# EAGLE board Aegis PCB 3D - 2 v66 (EAGLE 9.7.0)
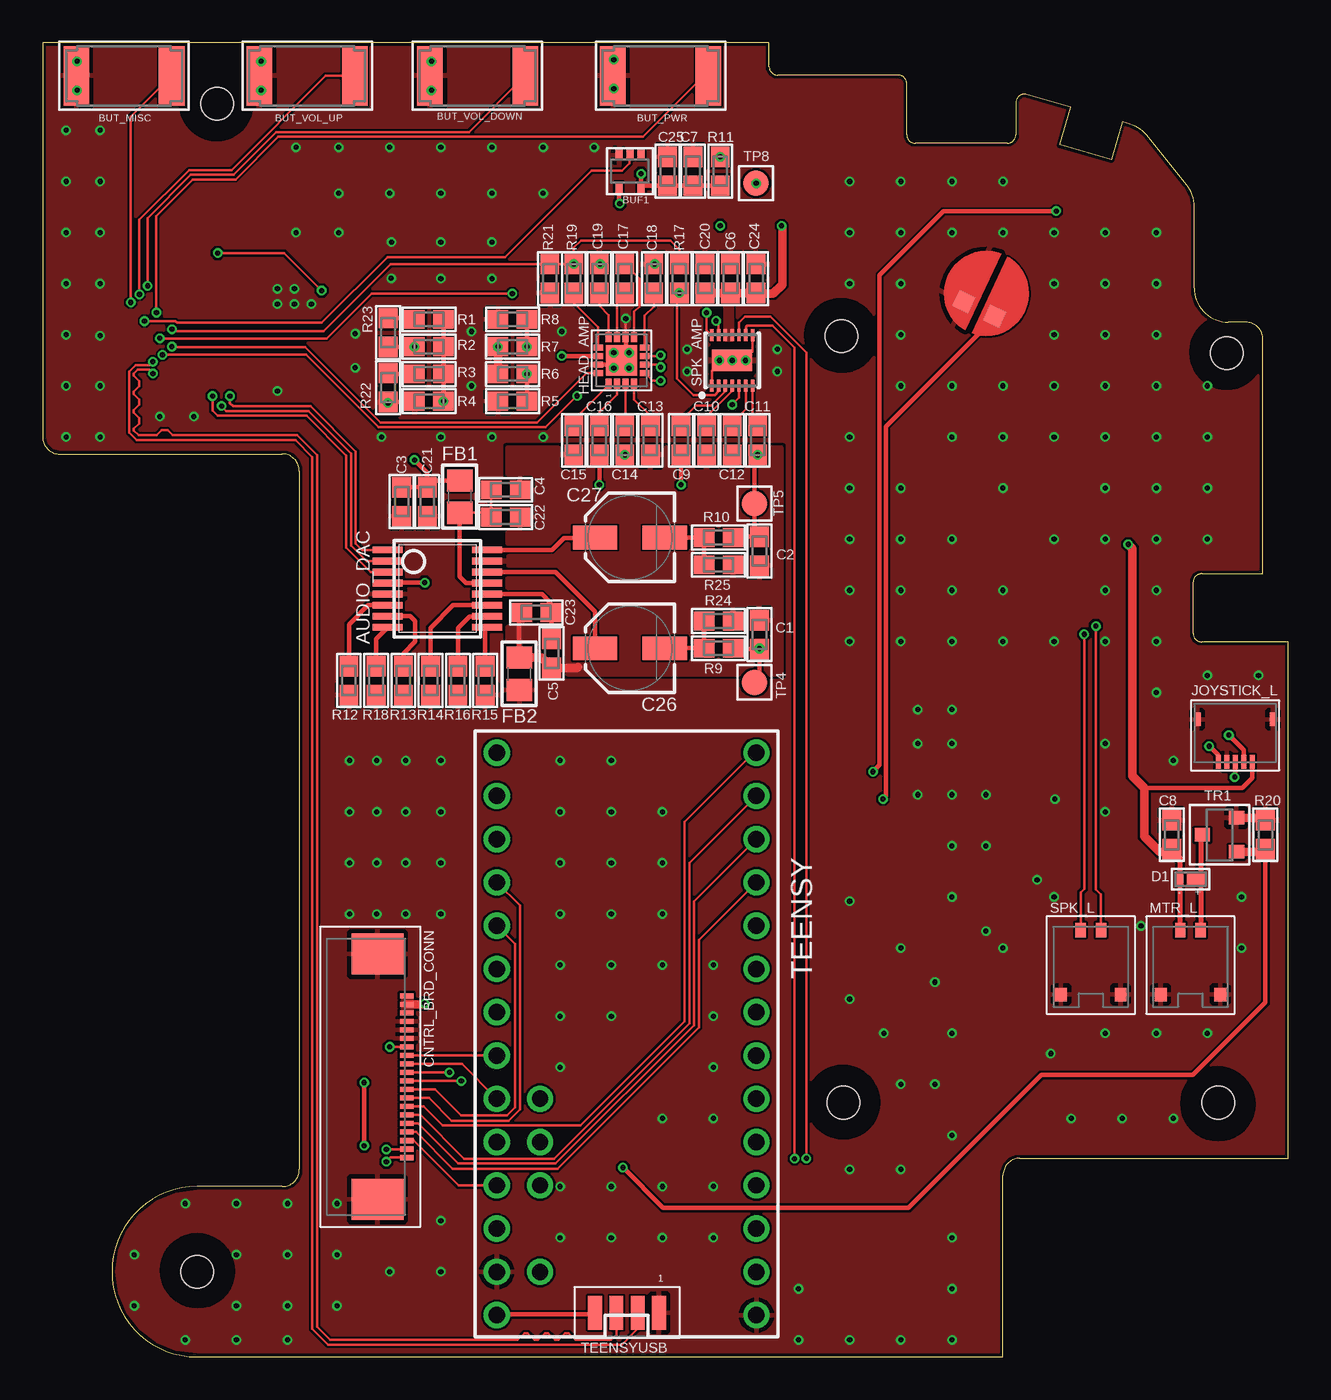
[diagram p0: board, top side]
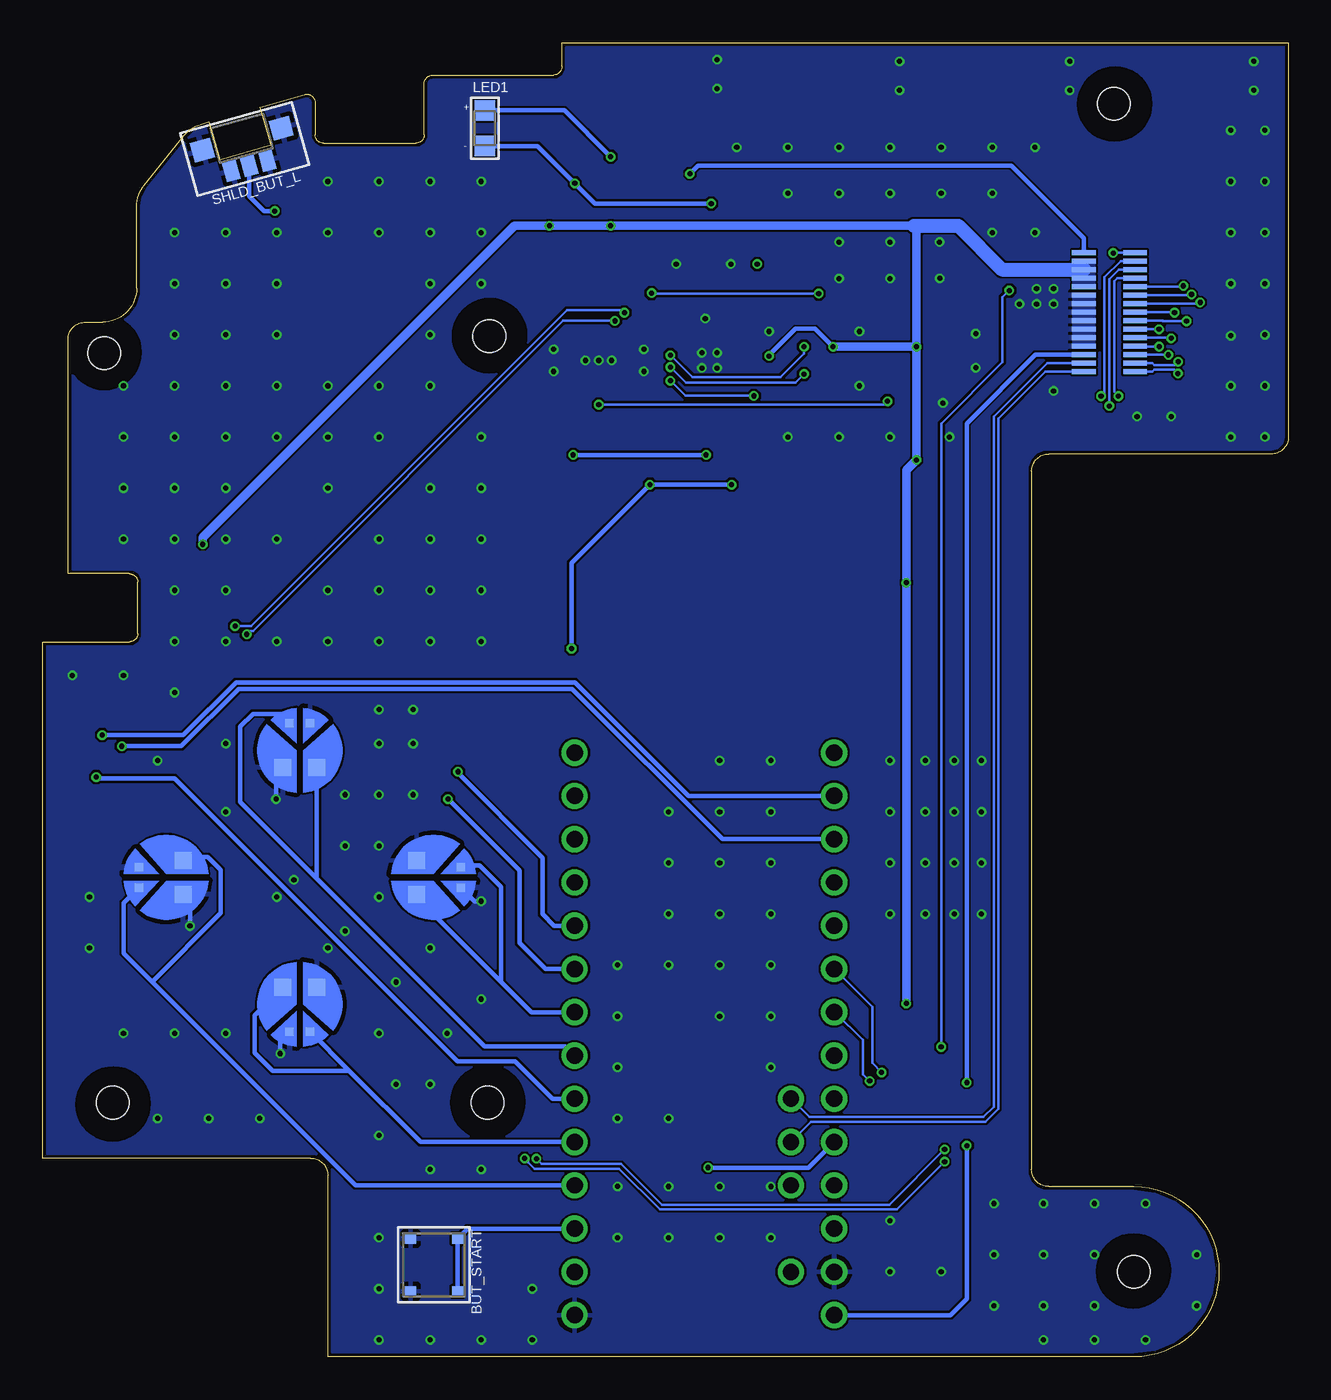
[diagram p1: board, bottom side, seen from below]

Size 73.13 x 77.15 mm. Coordinates in mm from the lower left corner, seen from the top.
Outline: 0,77.15 0,54 arc90 1,53 14.07,53 arc-90 15.07,52 15.07,11 arc-90 14.07,10 9.07,10 arc90 4.07,5 arc90 9.07,0 56.38,0 56.38,10.66 arc-90 57.38,11.66 73.13,11.66 73.13,41.97 68.04,41.97 arc-90 67.54,42.47 67.54,45.47 arc-90 68.04,45.97 71.63,45.97 71.63,59.74 arc90 70.63,60.74 69.6,60.74 arc-90 67.6,62.74 67.6,67.53 arc39 67.16,68.79 64.82,71.7 arc35 63.81,72.37 63.38,72.5 62.74,70.28 59.71,71.15 60.35,73.36 57.77,74.1 arc106 57.13,73.62 57.13,71.74 arc-90 56.63,71.24 51.23,71.24 arc-90 50.73,71.74 50.73,74.74 arc90 50.23,75.24 43.15,75.24 arc-90 42.65,75.74 42.65,77.15 0,77.15
Copper layers (1*16): Top / Bottom
Stack-up Default Layer Stack: Top User Defined 0.035mm / Dielectric-1 User Defined 1.6mm / Bottom User Defined 0.035mm
Design rules "jlcpcb *": minimum track width 5mil, minimum drill 0.3mm, track to track 5mil, track to pad 5mil, pad to pad 5mil, via to via 5mil, smd to smd 5mil, copper to edge 0.2mm, drill to drill 6mil, minimum pad ring 0.13mm, minimum via ring 0.13mm, stop-mask expansion 4mil, vias tented up to drill 0mil, thermal gap 10mil
Net classes: 1 PWR 1A: width 0.254 mm
Holes 1.9 mm at 46.9,59.93 10.25,73.55 47,14.93 69,14.93 69.5,58.93 9.07,5

## Footprints (pad centres in the part's own frame; a part is rotated, then mirrored left to right if it is on the bottom)
SSOP16_4.4MM = smd 0.4 x 1.75: 1 -2.275,-2.92; 2 -1.625,-2.92; 3 -0.975,-2.92; 4 -0.325,-2.92; 5 0.325,-2.92; 6 0.975,-2.92; 7 1.625,-2.92; 8 2.275,-2.92; 9 2.275,2.92; 10 1.625,2.92; 11 0.975,2.92; 12 0.325,2.92; 13 -0.325,2.92; 14 -0.975,2.92; 15 -1.625,2.92; 16 -2.275,2.92
CONN-AXK6F30347YG = smd 0.3 x 1.4: 1 -3.5,1.5; 2 -3,1.5; 3 -2.5,1.5; 4 -2,1.5; 5 -1.5,1.5; 6 -1,1.5; 7 -0.5,1.5; 8 0,1.5; 9 0.5,1.5; 10 1,1.5; 11 1.5,1.5; 12 2,1.5; 13 2.5,1.5; 14 3,1.5; 15 3.5,1.5; 16 3.5,-1.5; 17 3,-1.5; 18 2.5,-1.5; 19 2,-1.5; 20 1.5,-1.5; 21 1,-1.5; 22 0.5,-1.5; 23 0,-1.5; 24 -0.5,-1.5; 25 -1,-1.5; 26 -1.5,-1.5; 27 -2,-1.5; 28 -2.5,-1.5; 29 -3,-1.5; 30 -3.5,-1.5
BUF-74LVC1G07 = smd 0.42 x 0.6: A 0,-0.95; GND 0.65,-0.95; NC -0.65,-0.95; VCC -0.65,0.95; Y 0.65,0.95
BUT-KSS331GLFS = smd 1.5 x 3.5: 1 -2.8,0; 2 2.8,0
BUT-R-667834 = smd 0.6 x 0.65: A1 -1.55,-1.375; A2 1.55,-1.375; B1 -1.55,1.375; B2 1.55,1.375
CAP-603 = smd 1.2 x 1.1: A -0.85,0; C 0.85,0
PANASONIC_C = smd 2.6 x 1.4: + 2.05,0; - -2.05,0
CONN-0527462033 = smd 0.3 x 0.8: 1 -4.75,2; 2 -4.25,2; 3 -3.75,2; 4 -3.25,2; 5 -2.75,2; 6 -2.25,2; 7 -1.75,2; 8 -1.25,2; 9 -0.75,2; 10 -0.25,2; 11 0.25,2; 12 0.75,2; 13 1.25,2; 14 1.75,2; 15 2.25,2; 16 2.75,2; 17 3.25,2; 18 3.75,2; 19 4.25,2; 20 4.75,2 | smd 2.4 x 3.05: MP1 7.2,0.275; MP2 -7.2,0.275
DIODE-X3-WLB1608-2 = smd 1.035 x 0.69: A 0.293,0 | smd 0.385 x 0.69: C -0.619,0
0805@1 = smd 1.3 x 1.5: 1 -0.95,0; 2 0.95,0
IC-PAM8908 = smd 0.57 x 0.35: CAP+ 1.365,0.25; CAP- 1.365,-0.75; HPVDD 1.365,0.75; INL+ -1.365,0.25; INL- -1.365,0.75; INR+ -1.365,-0.25; INR- -1.365,-0.75; PGND 1.365,-0.25 | smd 0.35 x 0.57: EN 0.75,1.365; G0 -0.25,-1.365; G1 0.25,-1.365; HPVSS 0.75,-1.365; OUTL -0.75,1.365; OUTR -0.75,-1.365; PVDD 0.25,1.365; SGND -0.25,1.365 | smd 1.8 x 1.8: THERMAL 0,0
CONN-046809605110846+ = smd 0.3 x 0.8: 1 -1,0; 2 -0.5,0; 3 0,0; 4 0.5,0; 5 1,0 | smd 0.4 x 0.8: MP1 2.225,-2.5; MP2 -2.225,-2.5
LED-SM0805UWC = smd 1.2 x 1.2: A 0,1.05; C 0,-1.05
CONN-0781710002 = smd 0.6 x 0.85: 1 -0.6,0; 2 0.6,0 | smd 0.7 x 0.8: MP1 -1.75,-3.775; MP2 1.75,-3.775
AEGIS-BUTTONPAD = smd 1 x 1: P$1 -1,-1; P$2 1,-1 | smd 0.5 x 0.5: P$3 0.6,1.6; P$4 -0.6,1.6
AEGIN-SHLDPAD = smd 1 x 1: P$1 -1,-1; P$2 1,-1
RES-603 = smd 1.2 x 1.1: A -0.85,0; C 0.85,0
AEGIN-SHLDBUT = smd 0.8 x 1.2: A 0,-0.6; B1 -1.1,-0.6; B2 1.1,-0.6 | smd 1.2 x 1.2: MP1 -2.4,1; MP2 2.4,1
TDFN14_3X3MM = smd 0.7 x 0.2: P$1 -1.475,1.2; P$2 -1.475,0.8; P$3 -1.475,0.4; P$4 -1.475,0; P$5 -1.475,-0.4; P$6 -1.475,-0.8; P$7 -1.475,-1.2; P$8 1.475,-1.2; P$9 1.475,-0.8; P$10 1.475,-0.4; P$11 1.475,0; P$12 1.475,0.4; P$13 1.475,0.8; P$14 1.475,1.2 | smd 1.27 x 2.35: P$THERMAL 0,0
TEENSY_3.0-3.2&LC_DIL+4 = drill 0.965: 0 -7.62,13.97; 1 -7.62,11.43; 2 -7.62,8.89; 3 -7.62,6.35; 3.3V 7.62,11.43; 4 -7.62,3.81; 5 -7.62,1.27; 6 -7.62,-1.27; 7 -7.62,-3.81; 8 -7.62,-6.35; 9 -7.62,-8.89; 10 -7.62,-11.43; 11 -7.62,-13.97; 12 -7.62,-16.51; 13 7.62,-16.51; 14/A0 7.62,-13.97; 15/A1 7.62,-11.43; 16/A2 7.62,-8.89; 17/A3 7.62,-6.35; 18/A4 7.62,-3.81; 19/A5 7.62,-1.27; 20/A6 7.62,1.27; 21/A7 7.62,3.81; 22/A8 7.62,6.35; 23/A9 7.62,8.89; A10 5.08,6.35; A11 5.08,3.81; AGND 7.62,13.97; AREF 5.08,8.89; GND -7.62,16.51; VIN 7.62,16.51; VUSB 5.08,13.97
CONN_4PIN = smd 0.8 x 2: 1 -2.5,-1.29; 2 -1.25,-1.29; 3 0,-1.29; 4 1.25,-1.29
TESTPOINT = smd 1.5 x 1.5: TP 0,0
TRAN-DMG2302UKQ = smd 0.8 x 0.9: D 0,1; G -1,-1; S 1,-1

## Placement (x,y rotation side)
AUDIO_DAC  UDA1334ATS  [SSOP16_4.4MM]  23.18,45.1 270 top
BOARD_CONN2  CONN-AXK6F30347YG  [CONN-AXK6F30347YG]  10.5,61.33 270 bottom
BUF1  BUF-74LVC1G07  [BUF-74LVC1G07]  34.48,69.6 180 top
BUT_MISC  BUT-KSS331GLFS  [BUT-KSS331GLFS]  4.78,75.2 0 top
BUT_PWR  BUT-KSS331GLFS  [BUT-KSS331GLFS]  36.28,75.2 0 top
BUT_START  BUT-R-667834  [BUT-R-667834]  50.15,5.4 270 bottom
BUT_VOL_DOWN  BUT-KSS331GLFS  [BUT-KSS331GLFS]  25.53,75.2 0 top
BUT_VOL_UP  BUT-KSS331GLFS  [BUT-KSS331GLFS]  15.53,75.2 0 top
C1  0.01uF  [CAP-603]  42.08,42.4 270 top
C2  0.01uF  [CAP-603]  42.08,47.3 90 top
C3  0.1uF  [CAP-603]  21.08,50.2 90 top
C4  0.1uF  [CAP-603]  27.18,50.9 180 top
C5  0.1uF  [CAP-603]  29.88,41.3 90 top
C6  0.1uF  [CAP-603]  40.38,63.3 270 top
C7  0.1uF  [CAP-603]  38.18,69.6 270 top
C8  0.1uF  [CAP-603]  66.28,30.65 270 top
C9  1uF  [CAP-603]  37.48,53.8 90 top
C10  1uF  [CAP-603]  38.98,53.8 90 top
C11  1uF  [CAP-603]  41.98,53.8 90 top
C12  1uF  [CAP-603]  40.48,53.8 90 top
C13  1uF  [CAP-603]  35.68,53.8 90 top
C14  1uF  [CAP-603]  34.18,53.8 90 top
C15  1uF  [CAP-603]  31.18,53.8 90 top
C16  1uF  [CAP-603]  32.68,53.8 90 top
C17  1uF  [CAP-603]  34.18,63.3 270 top
C18  1uF  [CAP-603]  35.88,63.3 270 top
C19  1uF  [CAP-603]  32.68,63.3 270 top
C20  2.2uF  [CAP-603]  38.88,63.3 270 top
C21  10uF  [CAP-603]  22.58,50.2 90 top
C22  10uF  [CAP-603]  27.18,49.3 180 top
C23  10uF  [CAP-603]  28.98,43.7 0 top
C24  10uF  [CAP-603]  41.88,63.3 270 top
C25  10uF  [CAP-603]  36.68,69.6 270 top
C26  47uF  [PANASONIC_C]  34.48,41.6 180 top
C27  47uF  [PANASONIC_C]  34.48,48.1 180 top
CNTRL_BRD_CONN  CONN-0527462033  [CONN-0527462033]  19.38,16.45 270 top
D1  [DIODE-X3-WLB1608-2]  67.38,28.05 0 top
FB1  Ferrite  [0805@1]  24.48,50.5 90 top
FB2  Ferrite  [0805@1]  27.98,40.1 270 top
HEAD_AMP  IC-PAM8908  [IC-PAM8908]  33.98,58.5 90 top
JOYSTICK_L  CONN-046809605110846+  [CONN-046809605110846+]  70,34.93 180 top
LED1  LED-SM0805UWC  [LED-SM0805UWC]  47.18,72.12 0 bottom
MTR_L  CONN-0781710002  [CONN-0781710002]  67.38,25.05 0 top
PAD_DOWN  AEGIS-BUTTONPAD  [AEGIS-BUTTONPAD]  58.03,20.7 180 bottom
PAD_LEFT  AEGIS-BUTTONPAD  [AEGIS-BUTTONPAD]  65.88,28.15 90 bottom
PAD_RIGHT  AEGIS-BUTTONPAD  [AEGIS-BUTTONPAD]  50.18,28.15 270 bottom
PAD_TRIGGER_L  AEGIN-SHLDPAD  [AEGIN-SHLDPAD]  55.4,62.43 335 top
PAD_UP  AEGIS-BUTTONPAD  [AEGIS-BUTTONPAD]  58.03,35.6 0 bottom
R1  0K  [RES-603]  22.68,60.9 180 top
R2  0K  [RES-603]  22.68,59.3 180 top
R3  0K  [RES-603]  22.68,57.7 180 top
R4  0K  [RES-603]  22.68,56.1 180 top
R5  0K  [RES-603]  27.58,56.1 180 top
R6  0K  [RES-603]  27.58,57.7 180 top
R7  0K  [RES-603]  27.58,59.3 180 top
R8  0K  [RES-603]  27.58,60.9 180 top
R9  100  [RES-603]  39.68,41.6 0 top
R10  100  [RES-603]  39.68,48.1 0 top
R11  2.2K  [RES-603]  39.78,69.6 270 top
R12  10K  [RES-603]  17.98,39.7 90 top
R13  10K  [RES-603]  21.18,39.7 90 top
R14  10K  [RES-603]  22.78,39.7 90 top
R15  10K  [RES-603]  25.98,39.7 90 top
R16  10K  [RES-603]  24.38,39.7 90 top
R17  10K  [RES-603]  37.38,63.3 90 top
R18  10K  [RES-603]  19.58,39.7 90 top
R19  10K  [RES-603]  31.18,63.3 90 top
R20  10K  [RES-603]  71.78,30.65 270 top
R21  10K  [RES-603]  29.78,63.3 90 top
R22  100K  [RES-603]  20.28,56.9 90 top
R23  100K  [RES-603]  20.28,60.13 270 top
R24  220K  [RES-603]  39.68,43.2 180 top
R25  220K  [RES-603]  39.68,46.5 180 top
SHLD_BUT_L  AEGIN-SHLDBUT  [AEGIN-SHLDBUT]  61.16,70.52 15.5 bottom
SPK_AMP  MAX98306ETD+T  [TDFN14_3X3MM]  40.48,58.5 90 top
SPK_L  CONN-0781710002  [CONN-0781710002]  61.53,25.05 0 top
TEENSY  TEENSY_LC_DIL+4  [TEENSY_3.0-3.2&LC_DIL+4]  34.28,18.96 180 top
TEENSYUSB  CONN_4PIN  [CONN_4PIN]  33.68,1.3 180 top
TP4  TESTPOINT  [TESTPOINT]  41.78,39.6 270 top
TP5  TESTPOINT  [TESTPOINT]  41.78,50.1 270 top
TP8  TESTPOINT  [TESTPOINT]  41.88,68.9 0 top
TR1  [TRAN-DMG2302UKQ]  69.08,30.65 90 top

## Library data of the parts
AUDIO_DAC C26 C27 FB1 FB2 SPK_AMP = microbuilder
BOARD_CONN2 BUF1 BUT_MISC BUT_PWR BUT_START BUT_VOL_DOWN BUT_VOL_UP C1-C25 CNTRL_BRD_CONN D1 HEAD_AMP JOYSTICK_L LED1 MTR_L PAD_DOWN PAD_LEFT PAD_RIGHT PAD_TRIGGER_L PAD_UP R1-R25 SHLD_BUT_L SPK_L TEENSYUSB TP4 TP5 TP8 TR1 = Personal
TEENSY = Teensy_3_and_LC_Series_Boards_v1.4

## Nets
A_SIG: CNTRL_BRD_CONN.16 TEENSY.10
AGND: AUDIO_DAC.15 C1.A C2.A C4.A C5.A C10.A C12.A C13.A C15.A C22.A C23.A FB2.1 R24.A R25.A
AMP_EN: BOARD_CONN2.10 R17.C R19.C R21.C
AREF: TEENSY.AREF
B_SIG: CNTRL_BRD_CONN.15 TEENSY.11
BITCLK_IN: AUDIO_DAC.1 BOARD_CONN2.2
BUT_DEC: BOARD_CONN2.5 BUT_VOL_DOWN.2
BUT_INC: BOARD_CONN2.6 BUT_VOL_UP.2
BUT_L3: JOYSTICK_L.3 TEENSY.4
BUT_MISC: BOARD_CONN2.7 BUT_MISC.2
BUT_R3: CNTRL_BRD_CONN.14 TEENSY.12
BUT_SHDN: BOARD_CONN2.8 BUT_PWR.2
CHG_LED: BOARD_CONN2.9 BUF1.A
DATA_IN: AUDIO_DAC.3 BOARD_CONN2.4
DEEM/CLKOUT: AUDIO_DAC.9 R15.C
DOWN_SIG: PAD_DOWN.P$2 PAD_DOWN.P$4 TEENSY.3
GND: AUDIO_DAC.5 BOARD_CONN2.19 BOARD_CONN2.20 BOARD_CONN2.21 BOARD_CONN2.22 BOARD_CONN2.23 BOARD_CONN2.24 BOARD_CONN2.25 BUF1.GND BUT_MISC.1 BUT_PWR.1 BUT_START.A1 BUT_START.A2 BUT_VOL_DOWN.1 BUT_VOL_UP.1 C3.A C6.A C7.A C8.A C18.A C19.A C20.A C21.A C24.A C25.A CNTRL_BRD_CONN.4 CNTRL_BRD_CONN.5 CNTRL_BRD_CONN.6 CNTRL_BRD_CONN.MP1 CNTRL_BRD_CONN.MP2 FB2.2 HEAD_AMP.PGND HEAD_AMP.SGND HEAD_AMP.THERMAL JOYSTICK_L.4 JOYSTICK_L.MP1 JOYSTICK_L.MP2 MTR_L.MP1 MTR_L.MP2 PAD_DOWN.P$1 PAD_DOWN.P$3 PAD_LEFT.P$1 PAD_LEFT.P$3 PAD_RIGHT.P$1 PAD_RIGHT.P$3 PAD_TRIGGER_L.P$1 PAD_UP.P$1 PAD_UP.P$3 R4.C R5.C R8.C R12.A R13.A R14.A R15.A R16.A R18.A R20.A R21.A R22.A SHLD_BUT_L.B1 SHLD_BUT_L.B2 SHLD_BUT_L.MP1 SHLD_BUT_L.MP2 SPK_AMP.P$1 SPK_AMP.P$8 SPK_AMP.P$THERMAL SPK_L.MP1 SPK_L.MP2 TEENSY.AGND TEENSY.GND TEENSYUSB.1 TR1.S
HEAD_EN: HEAD_AMP.EN R19.A
HEAD_GAIN0: HEAD_AMP.G0 R5.A R6.A
HEAD_GAIN1: HEAD_AMP.G1 R7.A R8.A
HEADL: BOARD_CONN2.12 HEAD_AMP.OUTL
HEADR: BOARD_CONN2.13 HEAD_AMP.OUTR
JOY_L_L/R: JOYSTICK_L.5 TEENSY.15/A1
JOY_L_U/D: JOYSTICK_L.2 TEENSY.14/A0
JOY_R_L/R: CNTRL_BRD_CONN.9 TEENSY.21/A7
JOY_R_U/D: CNTRL_BRD_CONN.8 TEENSY.20/A6
LEFT_SIG: PAD_LEFT.P$2 PAD_LEFT.P$4 TEENSY.2
MOT_CNTRL_R: CNTRL_BRD_CONN.18 TEENSY.23/A9
N$1: R20.C TEENSY.22/A8 TR1.G
N$2: AUDIO_DAC.8 R18.C
N$3: AUDIO_DAC.13 C4.C C22.C FB1.1
N$5: C27.- R10.A R25.C
N$7: C26.- R9.A R24.C
N$8: D1.A MTR_L.2 TR1.D
N$9: C13.C HEAD_AMP.INR-
N$10: AUDIO_DAC.12 C5.C C23.C
N$12: AUDIO_DAC.16 C27.+
N$13: AUDIO_DAC.14 C26.+
N$14: R1.C R23.A
N$15: R3.C R22.C
N$16: C9.C SPK_AMP.P$3
N$17: C10.C SPK_AMP.P$4
N$18: C11.C SPK_AMP.P$7
N$19: C12.C SPK_AMP.P$6
N$21: C14.C HEAD_AMP.INR+
N$22: C16.C HEAD_AMP.INL+
N$23: C15.C HEAD_AMP.INL-
N$24: C17.C HEAD_AMP.CAP+
N$28: C17.A HEAD_AMP.CAP-
N$29: C18.C HEAD_AMP.HPVSS
N$30: C19.C HEAD_AMP.HPVDD
N$50: LED1.A R11.A
N$51: BUF1.Y LED1.C TP8.TP
NPWR_LED: BOARD_CONN2.1 CNTRL_BRD_CONN.7
OUTL: C1.C C9.A C16.A R9.C TP4.TP
OUTR: C2.C C11.A C14.A R10.C TP5.TP
PLL_IN: AUDIO_DAC.10 R16.C
RIGHT_SIG: PAD_RIGHT.P$2 PAD_RIGHT.P$4 TEENSY.6
RP_RX: BOARD_CONN2.16 TEENSY.A10
RP_TX: BOARD_CONN2.17 TEENSY.A11
SELECT_SIG: CNTRL_BRD_CONN.17 TEENSY.9
SFOR0: AUDIO_DAC.11 R14.C
SFOR1: AUDIO_DAC.7 R13.C
SHLD_L_SIG: SHLD_BUT_L.A TEENSY.8
SHLD_R_SIG: CNTRL_BRD_CONN.10 TEENSY.18/A4
SPK_GAIN: R1.A R2.A R3.A R4.A SPK_AMP.P$5
SPK_SD: BOARD_CONN2.11 R17.A SPK_AMP.P$2
SPKL+: SPK_AMP.P$13 SPK_L.1
SPKL-: SPK_AMP.P$14 SPK_L.2
SPKR+: CNTRL_BRD_CONN.20 SPK_AMP.P$10
SPKR-: CNTRL_BRD_CONN.19 SPK_AMP.P$9
START_SIG: BUT_START.B1 BUT_START.B2 TEENSY.1
SYSCLK_IN: AUDIO_DAC.6 R12.C
T3.3: TEENSY.3.3V
TRIG_L_SIG: PAD_TRIGGER_L.P$2 TEENSY.7
TRIG_R_SIG: CNTRL_BRD_CONN.11 TEENSY.19/A5
UP_SIG: PAD_UP.P$2 PAD_UP.P$4 TEENSY.5
USB2_N: BOARD_CONN2.15 TEENSYUSB.3
USB2_P: BOARD_CONN2.14 TEENSYUSB.2
VBUS1: BOARD_CONN2.18 TEENSY.VIN TEENSYUSB.4
VREF3.3: AUDIO_DAC.4 BOARD_CONN2.26 BOARD_CONN2.27 BOARD_CONN2.28 BOARD_CONN2.29 C3.C C6.C C8.C C20.C C21.C C24.C CNTRL_BRD_CONN.1 CNTRL_BRD_CONN.2 CNTRL_BRD_CONN.3 D1.C FB1.2 HEAD_AMP.PVDD JOYSTICK_L.1 MTR_L.1 R2.C R6.C R7.C R23.C SPK_AMP.P$11 SPK_AMP.P$12
VSYS3.3: BOARD_CONN2.30 BUF1.VCC C7.C C25.C R11.C
VUSB: TEENSY.VUSB
WORDSEL_IN: AUDIO_DAC.2 BOARD_CONN2.3
X_SIG: CNTRL_BRD_CONN.13 TEENSY.16/A2
Y_SIG: CNTRL_BRD_CONN.12 TEENSY.17/A3

## Tracks (layer width: path | path; a pad name or v marks a point on that pad's centre or on a via)
A_SIG
  Top 0.152: CNTRL_BRD_CONN.16 22.03,13.7 24.38,11.35 30.12,11.35 38.24,19.47 38.24,26.73 TEENSY.10
AGND
  Top 0.254: FB2.1 27.98,42.55 27.98,43.55 C23.A
  Top 0.508: FB2.1 29.28,41.05 C5.A 31.38,40.45 31.43,40.5
  pour Top: 27.18,53.5 27.18,39.95 43.48,39.95 43.48,53.5
AMP_EN  (via drill 0.3)
  Top 0.152: 31.18,64.2 31.18,65.1 31.61,65.53 36.85,65.53 37.38,65 R17.C | 31.18,64.2 R19.C | v7.59,60.32 7.7,60.22 16.49,60.22 16.49,60.21 20.43,64.15 R21.C 31.13,64.15 31.18,64.2
  Bottom 0.152: BOARD_CONN2.10 7.6,60.33 v7.59,60.32
  other vias: 31.18,64.15
B_SIG
  Top 0.152: CNTRL_BRD_CONN.15 22.18,14.2 24.74,11.64 30.01,11.64 37.96,19.58 37.96,28.99 TEENSY.11
BITCLK_IN  (via drill 0.3)
  Top 0.152: v10.99,56.4 10.99,56 11.18,55.81 15.72,55.81 18.39,53.14 18.39,47.75 18.76,47.38 AUDIO_DAC.1
  Bottom 0.152: v10.99,56.4 10.79,56.6 10.79,63.38 9.84,64.33 BOARD_CONN2.2
BUT_DEC  (via drill 0.3)
  Top 0.152: BUT_VOL_DOWN.2 25.02,71.89 13.71,71.89 11.21,69.39 8.71,69.39 6.17,66.86 v6.17,62.87
  Bottom 0.152: BOARD_CONN2.5 6.21,62.83 v6.17,62.87
BUT_INC  (via drill 0.3)
  Top 0.152: BUT_VOL_UP.2 16.62,75.2 11.09,69.67 8.59,69.67 5.68,66.77 v5.68,62.37
  Bottom 0.152: BOARD_CONN2.6 5.72,62.33 v5.68,62.37
BUT_L3  (via drill 0.3)
  Top 0.254: JOYSTICK_L.3 70,34.06 v69.98,34.03
  Bottom 0.254: v69.98,34.03 69.9,33.95 65.38,33.95 48.78,17.35 45.38,17.35 43.18,15.15 TEENSY.4
BUT_MISC  (via drill 0.3)
  Top 0.152: BUT_MISC.2 5.18,72.8 v5.18,61.9
  Bottom 0.152: BOARD_CONN2.7 5.25,61.83 v5.18,61.9
BUT_R3
  Top 0.152: CNTRL_BRD_CONN.14 22.38,14.7 23.49,13.59 31.57,13.59 37.68,19.7 37.68,31.4 41.75,35.47 TEENSY.12
BUT_SHDN  (via drill 0.3)
  Top 0.152: BUT_PWR.2 38.83,75.2 35.25,71.62 13.82,71.62 11.32,69.12 8.82,69.12 6.68,66.97 v6.68,61.3
  Bottom 0.152: BOARD_CONN2.8 6.71,61.33 v6.68,61.3
CHG_LED  (via drill 0.3)
  Top 0.152: v5.98,60.8 7.38,60.8 7.39,60.81 7.79,60.81 7.9,60.7 16.39,60.7 20.24,64.56 27.13,64.56 32.21,69.63 34.01,69.63 34.44,70.07 34.44,70.51 BUF1.A
  Bottom 0.152: v5.98,60.8 7.37,60.8 7.38,60.81 8.98,60.81 BOARD_CONN2.9
DATA_IN  (via drill 0.3)
  Top 0.152: v9.98,56.4 9.98,55.55 10.28,55.25 15.49,55.25 17.83,52.91 17.83,47.51 19.27,46.08 AUDIO_DAC.3
  Bottom 0.152: BOARD_CONN2.4 10.05,63.33 10.23,63.15 10.23,56.65 v9.98,56.4
DEEM/CLKOUT
  Top 0.254: R15.C 25.98,42.7 AUDIO_DAC.9
DOWN_SIG
  Bottom 0.254: 55.13,16.8 50.94,12.61 TEENSY.3 | 55.13,16.8 PAD_DOWN.P$4 | 55.13,16.8 59.63,16.8 60.68,17.85 60.68,20.05 PAD_DOWN.P$2
GND  (via drill 0.3)
  Top 0.152: HEAD_AMP.PGND v34.23,60.95 | SPK_AMP.P$1 39.28,57.9 39.98,58.6 40.38,58.6 SPK_AMP.P$THERMAL 41.18,58.5 41.68,59 SPK_AMP.P$8
  Top 0.254: R22.A 21.78,56.05 R4.C | HEAD_AMP.SGND 33.33,58.25 v33.53,58.05 | HEAD_AMP.PGND 34.25,59.84 34.25,59.17 34.43,59 v34.43,58.95 | HEAD_AMP.THERMAL v34.43,58.05
  Top 0.508: TR1.S 71.63,31.65 R20.A
  Bottom 0.254: PAD_DOWN.P$3 59.18,18.55 v59.18,17.8 | PAD_LEFT.P$1 64.48,26.75 v64.48,25.3 | PAD_UP.P$1 59.43,34.2 v59.43,32.75 | PAD_RIGHT.P$3 47.78,26.75 v47.38,26.75
  other vias: 32.73,64.15 35.93,64.15 37.83,59.15 37.83,57.85 33.53,58.95 33.53,76.15 40.48,58.5 41.26,58.5 39.73,58.5 43.13,59.15 43.13,57.85 65.38,66 65.38,63 65.38,60 62.38,60 62.38,63 62.38,66 59.38,66 59.38,63 59.38,60 65.38,57 65.38,54 65.38,51 62.38,51 62.38,54 62.38,57 59.38,57 59.38,54 56.38,57 56.38,54 56.38,51 53.38,54 53.38,57 50.38,57 50.38,51 65.38,48 65.38,45 65.38,42 62.38,42 62.38,45 62.38,48 59.38,48 59.38,42 56.38,45 56.38,42 53.38,42 53.38,45 53.38,48 50.38,48 50.38,45 50.38,42 68.38,57 68.38,54 68.38,51 68.38,48 55.38,33 59.38,27 55.38,30 56.38,24 53.38,27 53.38,30 50.38,24 53.38,33 53.38,36 51.38,36 51.38,33 47.38,21 66.38,35 68.38,40 71.38,40 65.38,39 62.38,36 62.38,32 58.38,28 55.38,25 52.38,22 49.38,19 56.38,66 53.38,66 50.38,66 50.38,63 50.38,60 56.38,69 53.38,69 50.38,69 47.38,69 47.38,66 47.38,63 47.38,45 47.38,42 47.38,54 47.38,51 47.38,48 53.38,19 52.38,16 53.38,13 50.38,16 50.38,11 47.38,11 66.38,14 63.38,14 60.38,14 68.38,19 65.38,19 62.38,19 53.38,38 51.38,38 53.38,7 53.38,4 53.38,1 50.38,1 47.38,1 44.38,4 44.38,1 70.38,27 70.38,24 23.38,68.3 20.38,68.3 17.38,68.3 29.38,68.3 26.38,68.3 17.38,66 14.88,66 26.38,63.3 23.38,63.3 23.38,71 20.38,71 17.38,71 32.38,71 29.38,71 26.38,71 26.38,54 23.38,54 29.38,54 1.38,72 3.38,72 3.38,69 3.38,66 3.38,63 1.38,69 1.38,66 1.38,63 1.38,60 36.38,29 36.38,32 36.38,26 33.38,35 33.38,32 33.38,29 30.38,29 30.38,32 30.38,35 33.38,26 30.38,26 33.38,20 33.38,23 30.38,17 30.38,20 30.38,23 36.38,23 36.38,14 39.38,17 39.38,20 39.38,23 39.38,14 36.38,10 33.38,10 30.38,10 36.38,7 33.38,7 30.38,7 39.38,7 23.38,32 23.38,29 23.38,26 23.38,35 23.38,8 20.38,5 23.38,5 14.38,1 11.38,1 11.38,3 8.38,1 5.38,3 14.38,3 11.38,6 5.38,6 14.38,6 11.38,9 8.38,9 14.38,9 14.88,71 20.47,63.32 3.38,57 3.38,54 1.38,57 1.38,54 39.38,10.01 26.38,65.44 23.38,65.44 20.48,65.44 20.28,56 25.18,57 25.18,60.2 18.35,60.07 19.9,54 18.35,58.07 19.61,35 19.61,32 19.61,29 19.61,26 18.01,35 18.01,32 18.01,29 18.01,26 21.31,35 21.31,32 21.31,29 21.31,26 8.88,55.2 6.88,55.2 17.28,3 17.28,6 17.28,9 13.78,56.7 13.78,62.7 33.53,74.45 2.03,76.05 2.03,74.35 12.83,76.05 12.83,74.35 22.83,76.05 22.83,74.35 30.48,60.2 14.78,62.7 14.78,61.8 13.78,61.8 15.78,61.8 3.38,59.94
  pour Bottom (no thermals): 11.33,62.45 11.33,59.2 12.68,59.2 12.68,62.45
  pour Top (rank 2): -2.17,79.6 -2.17,-3.5 76.63,-3.5 76.63,79.6
  pour Bottom (rank 2): -1.72,79.3 -1.72,-2.35 75.33,-2.35 75.33,79.3
HEAD_EN
  Top 0.152: HEAD_AMP.EN 32.62,60.45 31.18,61.88 R19.A
HEAD_GAIN0  (via drill 0.3)
  Top 0.152: HEAD_AMP.G0 36.13,58.25 v36.28,58.1
  Top 0.254: R6.A R5.A
  Bottom 0.152: R6.A 28.95,57.18 35.36,57.18 v36.28,58.1
  other vias: 28.43,57.7
HEAD_GAIN1  (via drill 0.3)
  Top 0.152: HEAD_AMP.G1 36.23,58.75 v36.28,58.8
  Top 0.254: R8.A R7.A
  Bottom 0.152: R7.A 28.43,58.9 29.82,57.51 34.99,57.51 v36.28,58.8
  other vias: 28.43,59.3
HEADL  (via drill 0.3)
  Top 0.152: v7.58,59.3 7.6,59.29 15.41,59.29 19.85,54.85 29.03,54.85 31.93,57.75 HEAD_AMP.OUTL
  Bottom 0.152: BOARD_CONN2.12 8.96,59.33 8.93,59.3 v7.58,59.3
HEADR  (via drill 0.3)
  Top 0.152: HEAD_AMP.OUTR 35.8,57.3 v36.28,57.3 | v31.38,56.42 29.53,54.57 19.73,54.57 15.48,58.82 v7.04,58.82
  Bottom 0.152: v36.28,57.3 35.4,56.42 v31.38,56.42 | v7.04,58.82 7.83,58.82 7.84,58.83 BOARD_CONN2.13
JOY_L_L/R  (via drill 0.3)
  Top 0.254: JOYSTICK_L.5 69,35.33 v68.48,35.85
  Bottom 0.254: v68.48,35.85 64.98,35.85 61.61,39.22 42.04,39.22 33.21,30.39 TEENSY.15/A1
JOY_L_U/D  (via drill 0.3)
  Top 0.254: JOYSTICK_L.2 70.5,35.63 v69.63,36.5
  Bottom 0.254: v69.63,36.5 64.87,36.5 61.77,39.6 41.88,39.6 35.21,32.93 TEENSY.14/A0
JOY_R_L/R
  Top 0.152: CNTRL_BRD_CONN.9 24.61,17.2 TEENSY.21/A7
JOY_R_U/D
  Top 0.152: CNTRL_BRD_CONN.8 26.65,17.7 TEENSY.20/A6
LEFT_SIG
  Bottom 0.254: 66.71,22.02 54.75,10.07 TEENSY.2 | 66.71,22.02 68.38,23.7 68.38,26.65 PAD_LEFT.P$4 | 66.71,22.02 62.68,26.05 62.68,28.6 63.43,29.35 64.68,29.35 PAD_LEFT.P$2
MOT_CNTRL_R
  Top 0.152: CNTRL_BRD_CONN.18 21.78,12.7 24.41,10.07 TEENSY.23/A9
N$1  (via drill 0.3)
  Top 0.254: R20.C 71.78,20.8 67.53,16.55 58.63,16.55 50.83,8.75 36.43,8.75 v34.06,11.12
  Top 0.508: TR1.G 71.63,29.65 R20.C
  Bottom 0.254: v34.06,11.12 34.05,11.1 28.17,11.1 TEENSY.22/A8
N$2
  Top 0.254: R18.C 19.58,42.15 AUDIO_DAC.8
N$3
  Top 0.152: C4.C C22.C 26.08,49.55 FB1.1
  Top 0.254: AUDIO_DAC.13 24.86,45.42 24.48,45.8 FB1.1
N$5
  Top 0.254: C27.- R10.A R25.C
N$7
  Top 0.254: C26.- R9.A R24.C
N$8
  Top 0.305: TR1.D 67.98,30.55 67.98,28.15 67.77,28.15 D1.A 67.98,27.74 MTR_L.2
N$9
  Top 0.152: HEAD_AMP.INR- 34.73,56.2 35.68,55.25 C13.C
N$10
  Top 0.254: AUDIO_DAC.12 29.31,44.77 29.83,44.25 C23.C 29.88,43.65 C5.C
N$12
  Top 0.254: AUDIO_DAC.16 29.9,47.38 30.6,48.08 32.41,48.08 C27.+
N$13
  Top 0.254: AUDIO_DAC.14 30.11,46.08 32.43,43.75 C26.+
N$14
  Top 0.254: R23.A 21.75,60.98 R1.C
N$15
  Top 0.254: R22.C 20.33,57.7 R3.C
N$16
  Top 0.152: C9.C 37.48,54.99 38.35,55.85 39.25,55.85 40.08,56.69 SPK_AMP.P$3
N$17
  Top 0.152: C10.C 39.18,54.85 39.18,55.39 40.48,56.69 SPK_AMP.P$4
N$18
  Top 0.152: C11.C 41.68,54.95 SPK_AMP.P$7
N$19
  Top 0.152: SPK_AMP.P$6 41.28,55.65 40.48,54.85 C12.C
N$21
  Top 0.152: HEAD_AMP.INR+ 34.23,54.7 C14.C
N$22
  Top 0.152: C16.C 32.68,55.45 33.73,56.5 HEAD_AMP.INL+
N$23
  Top 0.152: HEAD_AMP.INL- 33.23,57.03 31.18,54.98 C15.C
N$24
  Top 0.152: HEAD_AMP.CAP+ 33.73,62 C17.C
N$28
  Top 0.152: HEAD_AMP.CAP- 34.73,61.36 35.03,61.67 35.03,63.3 C17.A
N$29
  Top 0.152: HEAD_AMP.HPVSS 35.35,61.12 35.88,61.65 C18.C
N$30
  Top 0.152: HEAD_AMP.HPVDD 33.23,61.16 32.68,61.72 C19.C
N$50  (via drill 0.3)
  Bottom 0.254: R11.A 42.5,73.17 LED1.A
  other vias: 39.78,70.45
N$51  (via drill 0.3)
  Top 0.254: v33.88,67.7 33.83,67.75 BUF1.Y | TP8.TP v41.89,68.89
  Bottom 0.254: LED1.C 44.08,71.07 v41.89,68.89 40.7,67.7 v33.88,67.7
NPWR_LED  (via drill 0.3)
  Top 0.152: CNTRL_BRD_CONN.7 v20.38,18.2 | v16.38,62.6 14.18,64.8 v10.28,64.8
  Bottom 0.152: BOARD_CONN2.1 10.25,64.83 v10.28,64.8 | v20.38,18.2 20.38,54.8 16.78,58.4 16.78,62.2 v16.38,62.6
OUTL  (via drill 0.3)
  Top 0.254: C1.C 42.08,39.9 TP4.TP | C9.A v37.48,51.2 | C16.A v32.68,51.2 | C1.C 40.58,41.55 R9.C | C1.C v42.08,41.58
  Bottom 0.254: v32.68,51.2 v37.48,51.2 42.08,46.6 v42.08,41.58
OUTR  (via drill 0.3)
  Top 0.254: R10.C 40.58,48.15 C2.C 41.78,48.45 TP5.TP 41.78,52.75 C11.A
  Bottom 0.254: C11.A C14.A
  other vias: 41.98,52.95 34.18,52.95
PLL_IN
  Top 0.254: R16.C 24.38,42.8 25.06,43.48 AUDIO_DAC.10
RIGHT_SIG
  Bottom 0.254: 46.22,22.01 51.18,26.97 PAD_RIGHT.P$2 | 46.22,22.01 46.22,27.59 47.48,28.85 48.48,28.85 PAD_RIGHT.P$4 | 46.22,22.01 44.44,20.23 TEENSY.6
RP_RX
  Bottom 0.152: TEENSY.A10 28.02,13.8 17.78,13.8 17.02,14.56 17.02,55.07 14.25,57.83 BOARD_CONN2.16
RP_TX
  Bottom 0.152: TEENSY.A11 28.13,14.08 17.9,14.08 17.3,14.68 17.3,55.18 14.15,58.33 BOARD_CONN2.17
SELECT_SIG
  Top 0.152: CNTRL_BRD_CONN.17 21.92,13.2 24.07,11.05 30.21,11.05 38.52,19.35 38.52,24.2 38.52,24.27 38.52,24.47 TEENSY.9
SFOR0
  Top 0.254: R14.C 22.78,42.8 24.11,44.12 AUDIO_DAC.11
SFOR1
  Top 0.254: R13.C 21.18,41.3 21.88,42 21.88,43.2 21.58,43.5 20.29,43.5 AUDIO_DAC.7
SHLD_L_SIG  (via drill 0.3)
  Top 0.254: v59.5,67.26 v59.5,67.25 52.88,67.25 49.13,63.5 49.13,34.73 v48.75,34.35
  Bottom 0.254: SHLD_BUT_L.A 61,68.14 60.12,67.26 v59.5,67.26 | v48.75,34.35 48.75,34.27 43.78,29.3 43.78,26 43.09,25.31 TEENSY.8
SHLD_R_SIG  (via drill 0.3)
  Top 0.152: CNTRL_BRD_CONN.10 v23.88,16.7
  Bottom 0.152: v23.88,16.7 24.43,17.25 24.43,20.54 TEENSY.18/A4
SPK_GAIN  (via drill 0.3)
  Top 0.152: SPK_AMP.P$5 40.88,56.3 v40.48,55.9
  Top 0.254: R1.A R2.A R3.A R4.A
  Bottom 0.152: v40.48,55.9 23.73,55.9 R4.A
  other vias: 23.53,56.1
SPK_SD  (via drill 0.3)
  Top 0.152: SPK_AMP.P$2 39.68,56.69 39.46,56.47 38.21,56.47 37.25,57.43 37.25,62.32 R17.A | v6.88,59.8 6.89,59.79 16.67,59.79 19.3,62.42 v27.57,62.42
  Bottom 0.152: R17.A 37.35,62.42 v27.57,62.42 | BOARD_CONN2.11 6.91,59.83 v6.88,59.8
  other vias: 37.38,62.45
SPKL+  (via drill 0.3)
  Top 0.152: SPK_AMP.P$13 39.68,60.67 v39.53,60.82 | SPK_L.1 60.94,25.06 60.94,27.26 61.14,27.46 v61.14,42.42
  Bottom 0.152: v61.14,42.42 60.94,42.62 60.77,42.62 42.57,60.82 v39.53,60.82
SPKL-  (via drill 0.3)
  Top 0.152: v38.98,61.3 38.98,60.27 SPK_AMP.P$14 | SPK_L.2 62.13,27.15 61.83,27.45 v61.83,42.9
  Bottom 0.152: v38.98,61.3 38.98,61.31 39.11,61.45 42.34,61.45 60.89,42.9 v61.83,42.9
SPKR+  (via drill 0.3)
  Top 0.152: SPK_AMP.P$10 40.88,60.7 41.23,61.05 42.73,61.05 44.83,58.95 v44.83,11.65 | CNTRL_BRD_CONN.20 20.42,11.7 v20.18,11.46
  Bottom 0.152: v20.18,11.46 22.99,8.65 36.9,8.65 39.3,11.05 44.24,11.05 44.63,11.44 44.63,11.45 v44.83,11.65
SPKR-  (via drill 0.3)
  Top 0.152: SPK_AMP.P$9 41.28,60.45 41.36,60.53 42.85,60.53 44.14,59.24 v44.14,11.64 | CNTRL_BRD_CONN.19 21.36,12.18 v20.18,12.18
  Bottom 0.152: v20.18,12.18 23.43,8.93 36.78,8.93 39.18,11.33 43.84,11.33 v44.14,11.64
START_SIG
  Bottom 0.254: BUT_START.B2 BUT_START.B1 48.2,7.53 TEENSY.1
SYSCLK_IN
  Top 0.254: R12.C 17.98,43 19.11,44.12 AUDIO_DAC.6
TRIG_L_SIG  (via drill 0.3)
  Top 0.254: PAD_TRIGGER_L.P$2 55.89,61 49.51,54.62 49.51,32.93 v49.33,32.75
  Bottom 0.254: v49.33,32.75 45.13,28.55 45.13,24.3 43.6,22.77 TEENSY.7
TRIG_R_SIG  (via drill 0.3)
  Top 0.152: CNTRL_BRD_CONN.11 v24.58,16.2
  Bottom 0.152: v24.58,16.2 24.98,16.6 24.98,18.6 26.61,20.23 TEENSY.19/A5
UP_SIG
  Bottom 0.254: 57.03,28.08 47.19,18.24 42.45,18.24 TEENSY.5 | PAD_UP.P$2 57.03,28.08 | 57.03,28.08 61.53,32.58 61.53,37 60.78,37.75 58.98,37.75 58.63,37.4 PAD_UP.P$4
USB2_N  (via drill 0.3)
  Top 0.152: v6.48,57.73 v6.48,57.74 6.29,57.93 6.27,57.93 6.25,57.95 5.58,57.95 5.36,57.73 5.36,57.61 5.68,57.29 5.68,56.99 5.36,56.67 5.36,56.51 5.68,56.19 5.68,55.9 5.36,55.58 5.36,55.43 5.67,55.12 5.67,54.79 5.36,54.48 5.36,54.37 5.63,54.1 6.69,54.1 7,54.41 7.33,54.41 7.64,54.1 14.96,54.1 16.11,52.95 16.11,1.77 16.88,1 27.88,1 28.28,1.4 28.48,1.4 28.88,1 29.08,1 29.48,1.4 29.68,1.4 30.08,1 30.28,1 30.68,1.4 30.88,1.4 31.28,1 33.38,1 33.68,1.3 TEENSYUSB.3
  Bottom 0.152: BOARD_CONN2.15 7.99,57.83 7.88,57.94 6.68,57.94 v6.48,57.74 v6.48,57.73
USB2_P  (via drill 0.3)
  Top 0.152: v6.47,58.42 6.29,58.23 5.46,58.23 5.08,57.84 5.08,54.26 5.51,53.82 14.84,53.82 15.83,52.83 15.83,1.66 16.76,0.72 34,0.72 34.93,1.65 TEENSYUSB.2
  Bottom 0.152: BOARD_CONN2.14 7.99,58.33 7.88,58.22 6.68,58.22 v6.48,58.42 v6.47,58.42
VBUS1  (via drill 0.3)
  Top 0.254: TEENSY.VIN 26.7,2.49 32.33,2.49 TEENSYUSB.4 | v18.88,16.1 v18.88,12.4
  Bottom 0.254: BOARD_CONN2.18 14.85,58.83 18.88,54.8 v18.88,16.1 | v18.88,12.4 18.88,3.4 19.83,2.45 TEENSY.VIN
  pour Bottom (isolate 0.254, no thermals): 11.33,58.45 11.33,57.7 12.68,57.7 12.68,58.45
VREF3.3  (via drill 0.3)
  Top 0.254: FB1.2 22.98,51.45 C21.C | C21.C C3.C | R23.C 21.81,59.28 R2.C | v30.48,58.75 HEAD_AMP.PVDD | v22.43,45.45 20.29,45.45 AUDIO_DAC.4 | JOYSTICK_L.1 71,33.97 70.43,33.4 64.68,33.4 | v21.83,52.65 22.58,51.9 C21.C
  Top 0.305: C8.C 66.43,29.65 66.76,29.32 D1.C 66.76,25.07 MTR_L.1
  Top 0.508: C20.C C6.C C24.C 41.93,62.4 42.88,62.4 43.43,62.95 43.43,66.35 v43.38,66.4 | R7.C R6.C | v63.73,47.7 63.98,47.45 63.98,34.1 64.68,33.4 64.68,30.55 65.58,29.65 66.43,29.65 | v22.43,20.74 22.39,20.7 CNTRL_BRD_CONN.2
  Bottom 0.254: R7.C 27.78,60.35 28.93,60.35 30.48,58.8 v30.48,58.75
  Bottom 0.508: R2.C R7.C | v22.43,20.74 v22.43,45.45 22.43,52.05 v21.83,52.65 R2.C | v63.73,47.7 63.73,48.1 45.43,66.4 v43.38,66.4 v39.78,66.4 21.98,66.4 21.83,66.25 R2.C
  Bottom 0.813: 21.98,66.4 19.38,66.4 16.81,63.83 BOARD_CONN2.28
  other vias: 21.83,59.3 26.73,59.3
  pour Top (no thermals): 39.98,59.6 40.58,59.6 40.58,62.5 39.98,62.5
  pour Bottom (no thermals): 11.33,64.45 11.33,62.7 12.68,62.7 12.68,64.45
  pour Top (no thermals): 21.78,20.05 21.78,21.35 21.03,21.35 21.03,20.05
VSYS3.3  (via drill 0.3)
  Top 0.254: v35.13,69.45 BUF1.VCC 35.23,68.75 C25.C C7.C R11.C
  Bottom 0.254: v35.13,69.45 34.65,69.93 16.27,69.93 12,65.66 BOARD_CONN2.30
WORDSEL_IN  (via drill 0.3)
  Top 0.152: v10.51,55.82 10.51,55.79 10.77,55.53 15.61,55.53 18.11,53.02 18.11,47.63 19.02,46.73 AUDIO_DAC.2
  Bottom 0.152: BOARD_CONN2.3 9.94,63.83 10.51,63.27 v10.51,55.82
X_SIG
  Top 0.152: CNTRL_BRD_CONN.13 22.68,15.2 24.01,13.87 27.35,13.87 28.03,14.54 28.03,26.49 TEENSY.16/A2
Y_SIG
  Top 0.152: CNTRL_BRD_CONN.12 23.04,15.7 24.56,14.18 27.26,14.18 27.73,14.65 27.73,24.24 TEENSY.17/A3
(copper drawn outside any net)
  shapes: Bottom area x6, Top area x6